# EAGLE board tester (EAGLE 9.6.2), part 1 of 2
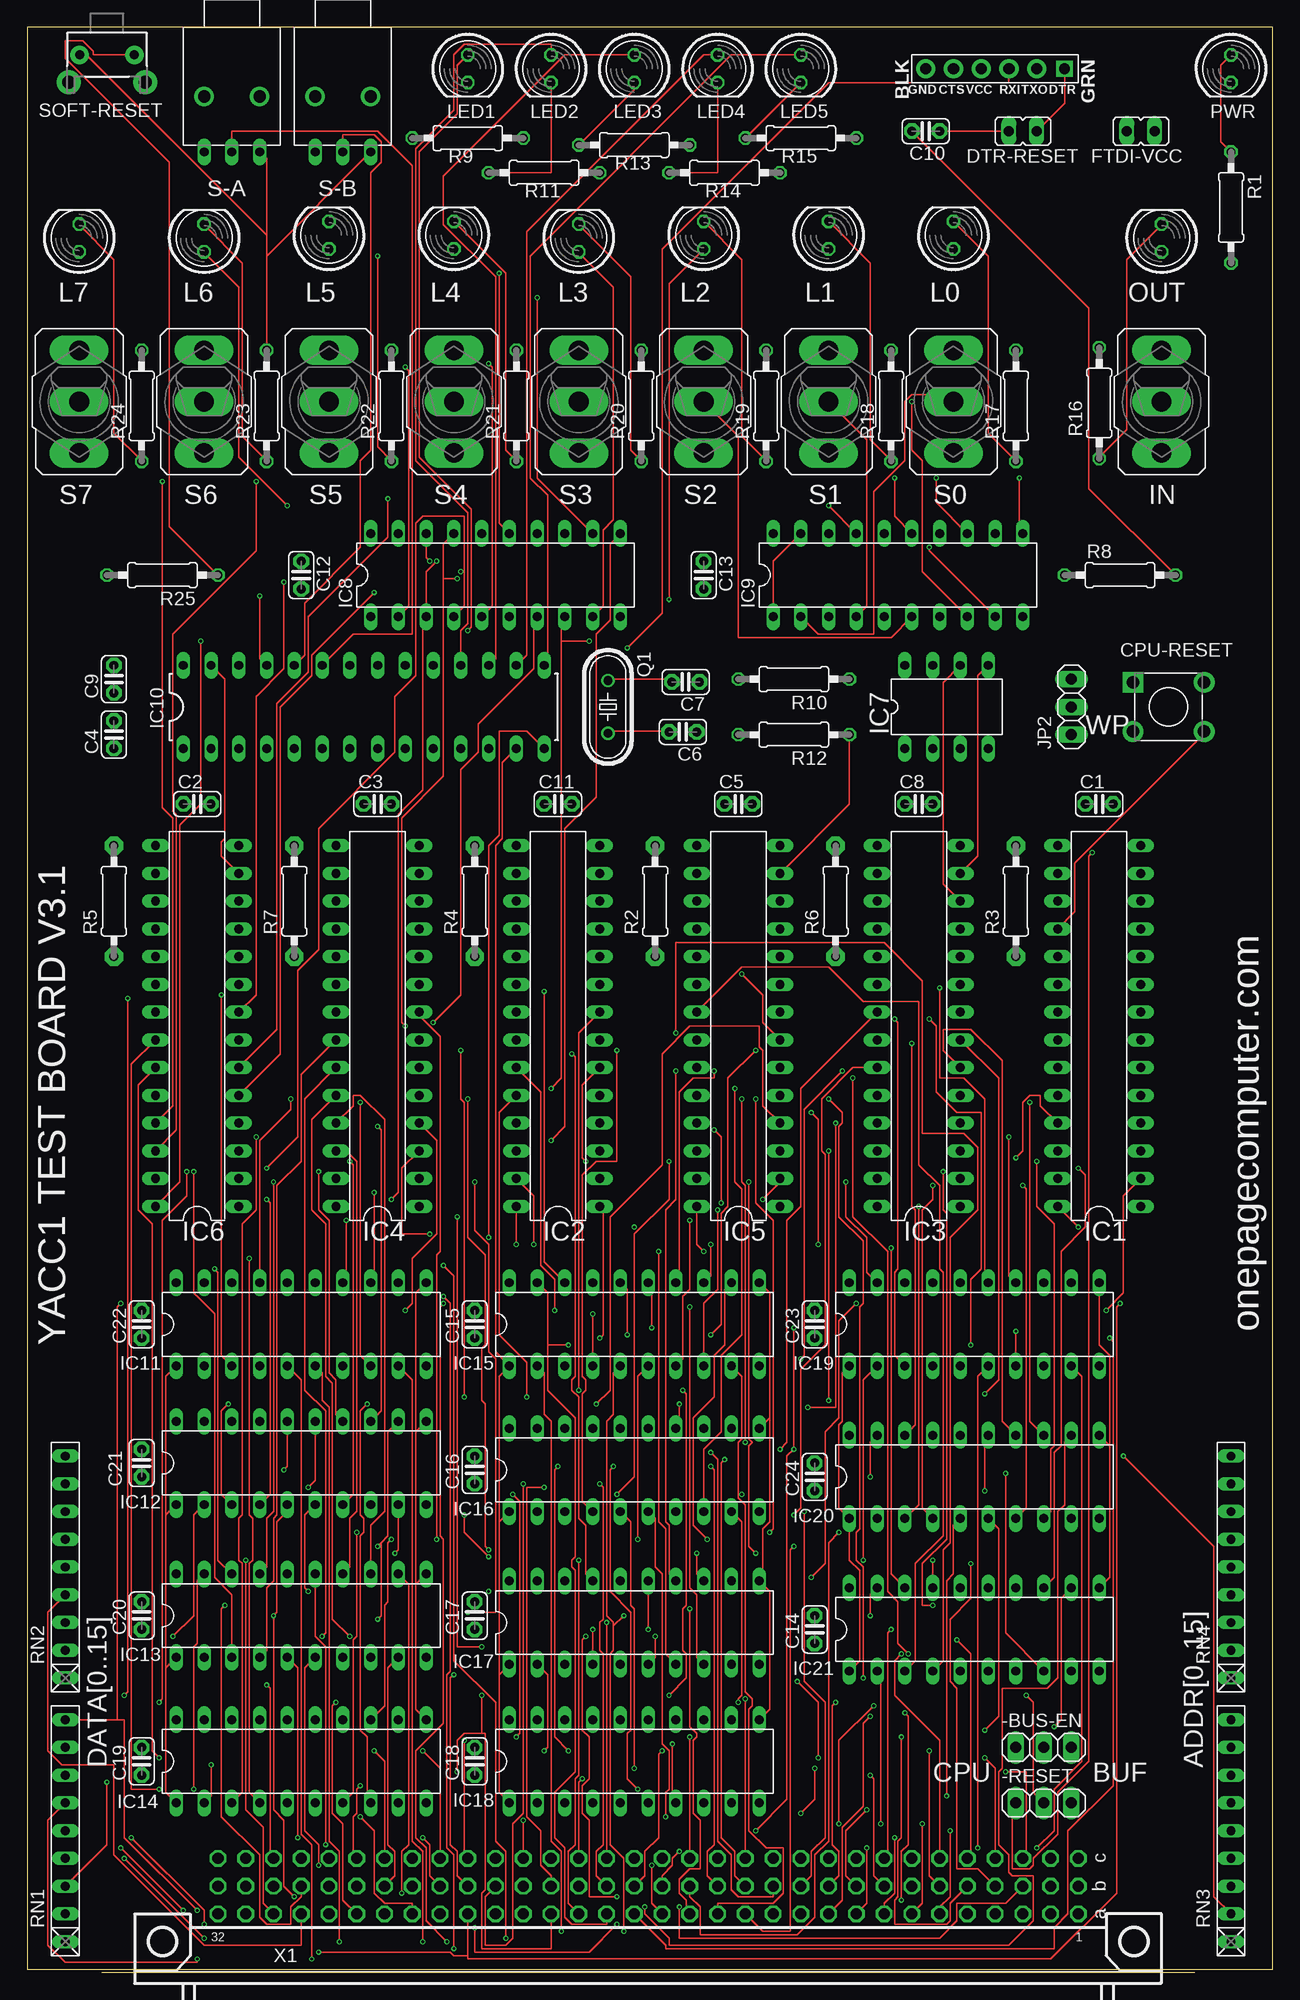
[diagram p0: board, top side]
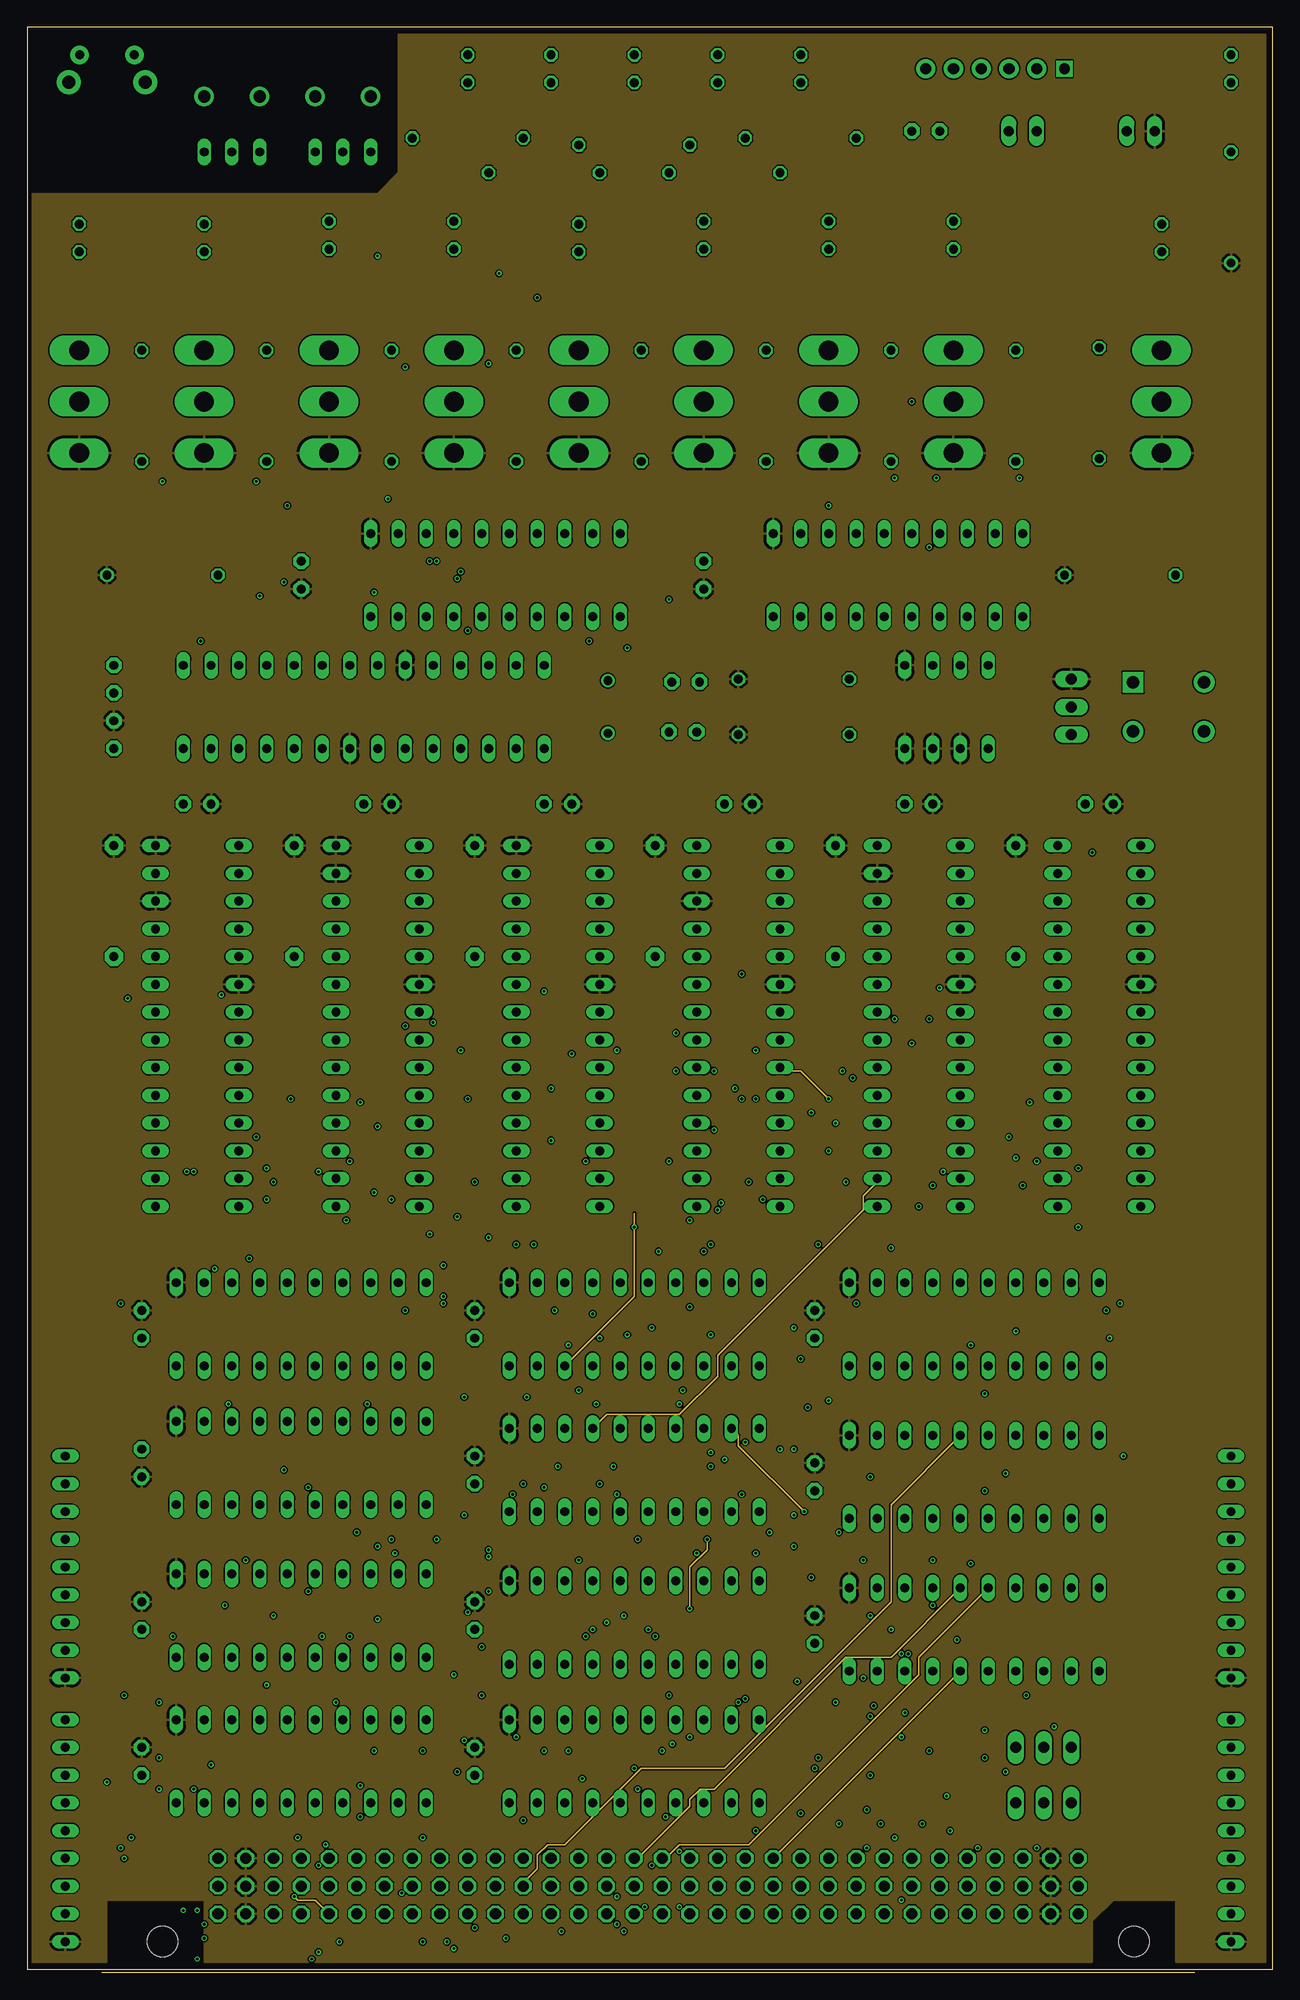
[diagram p1: board, inner layer Route2]
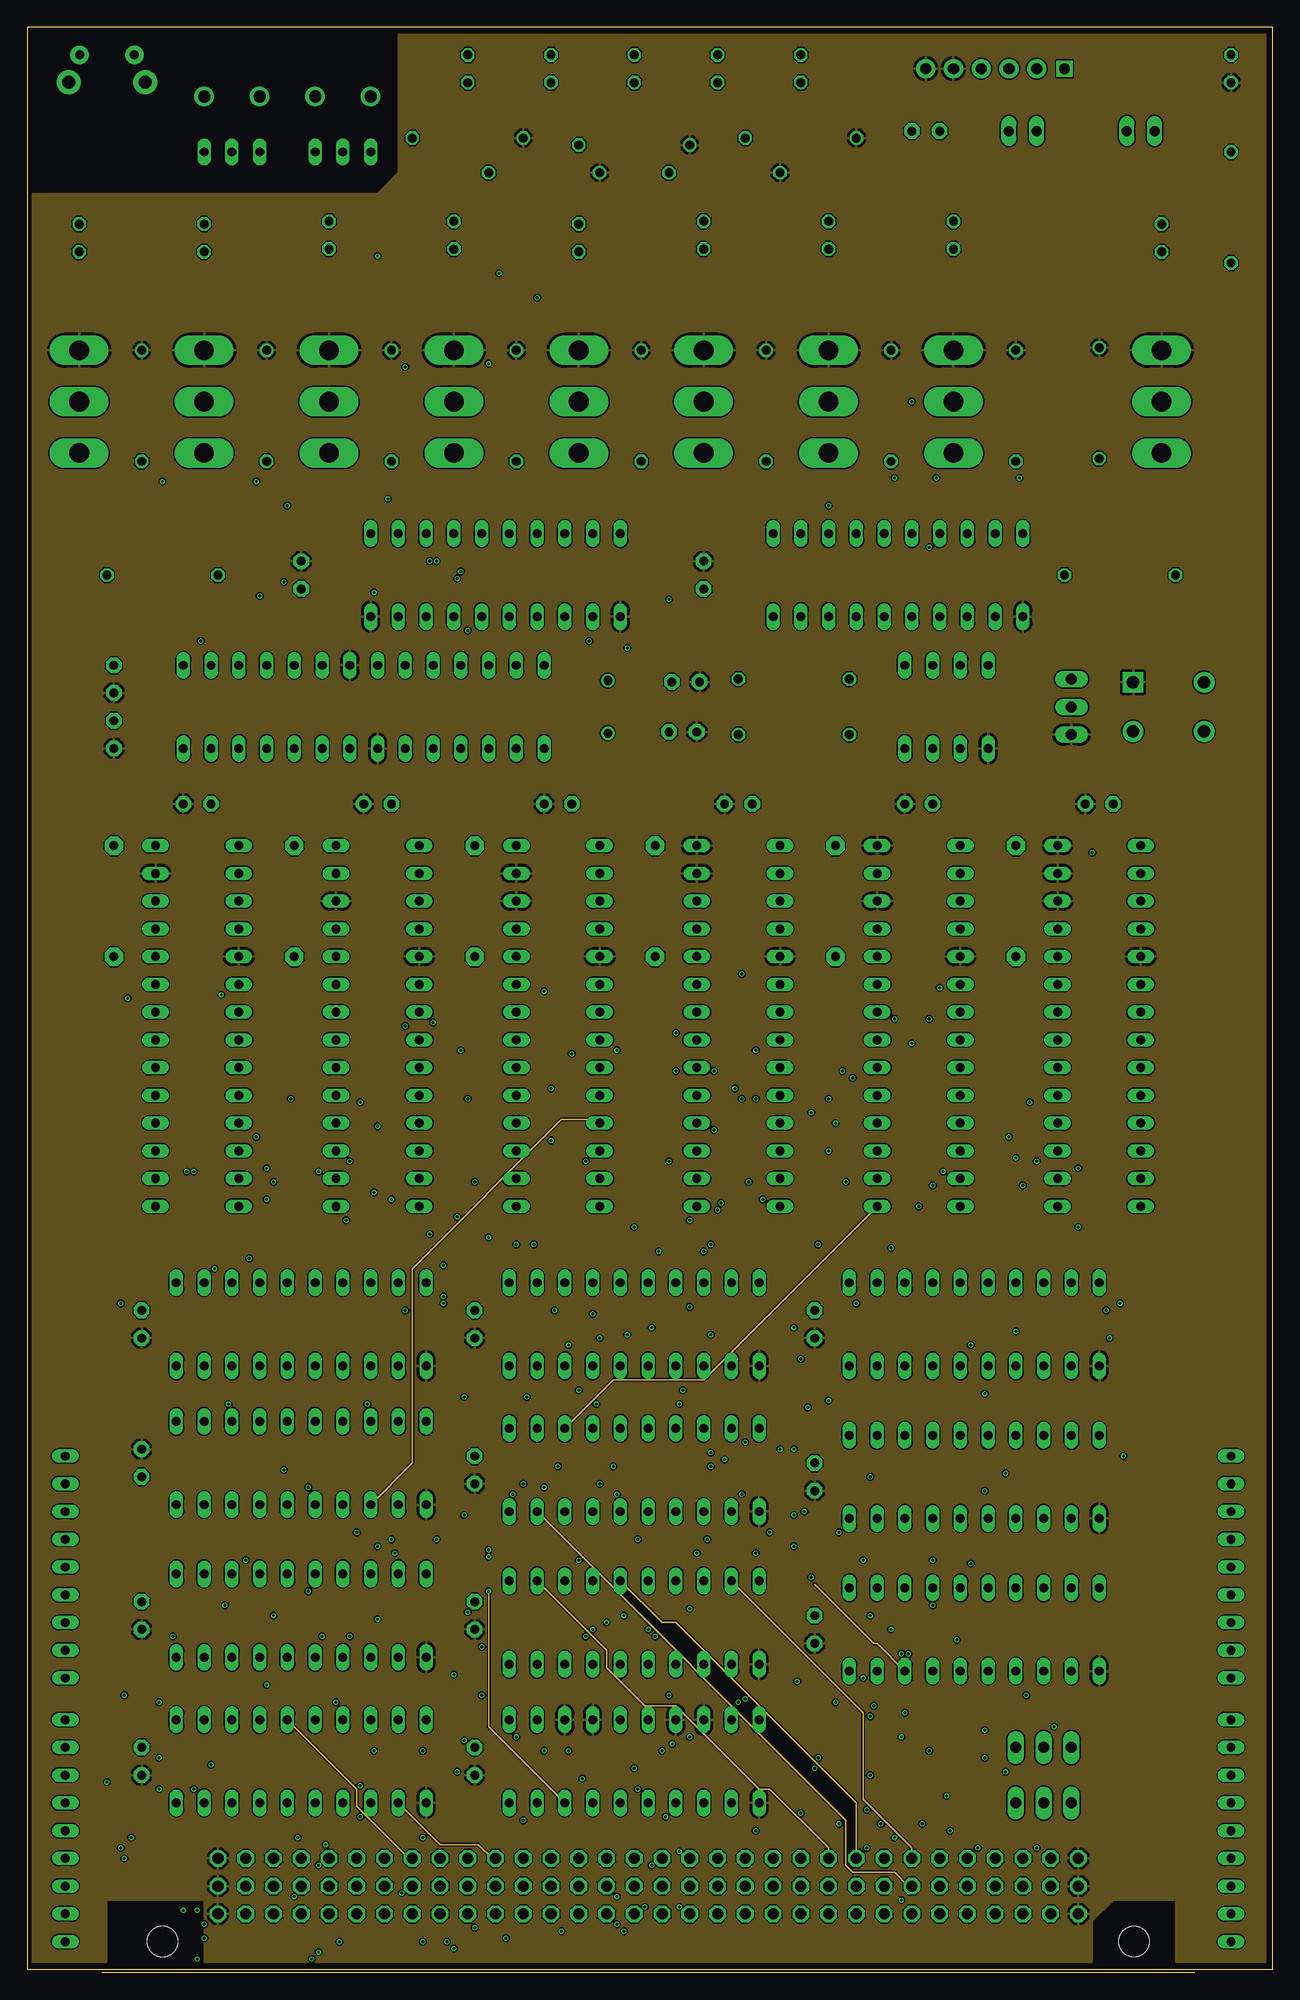
[diagram p2: board, inner layer Route15]
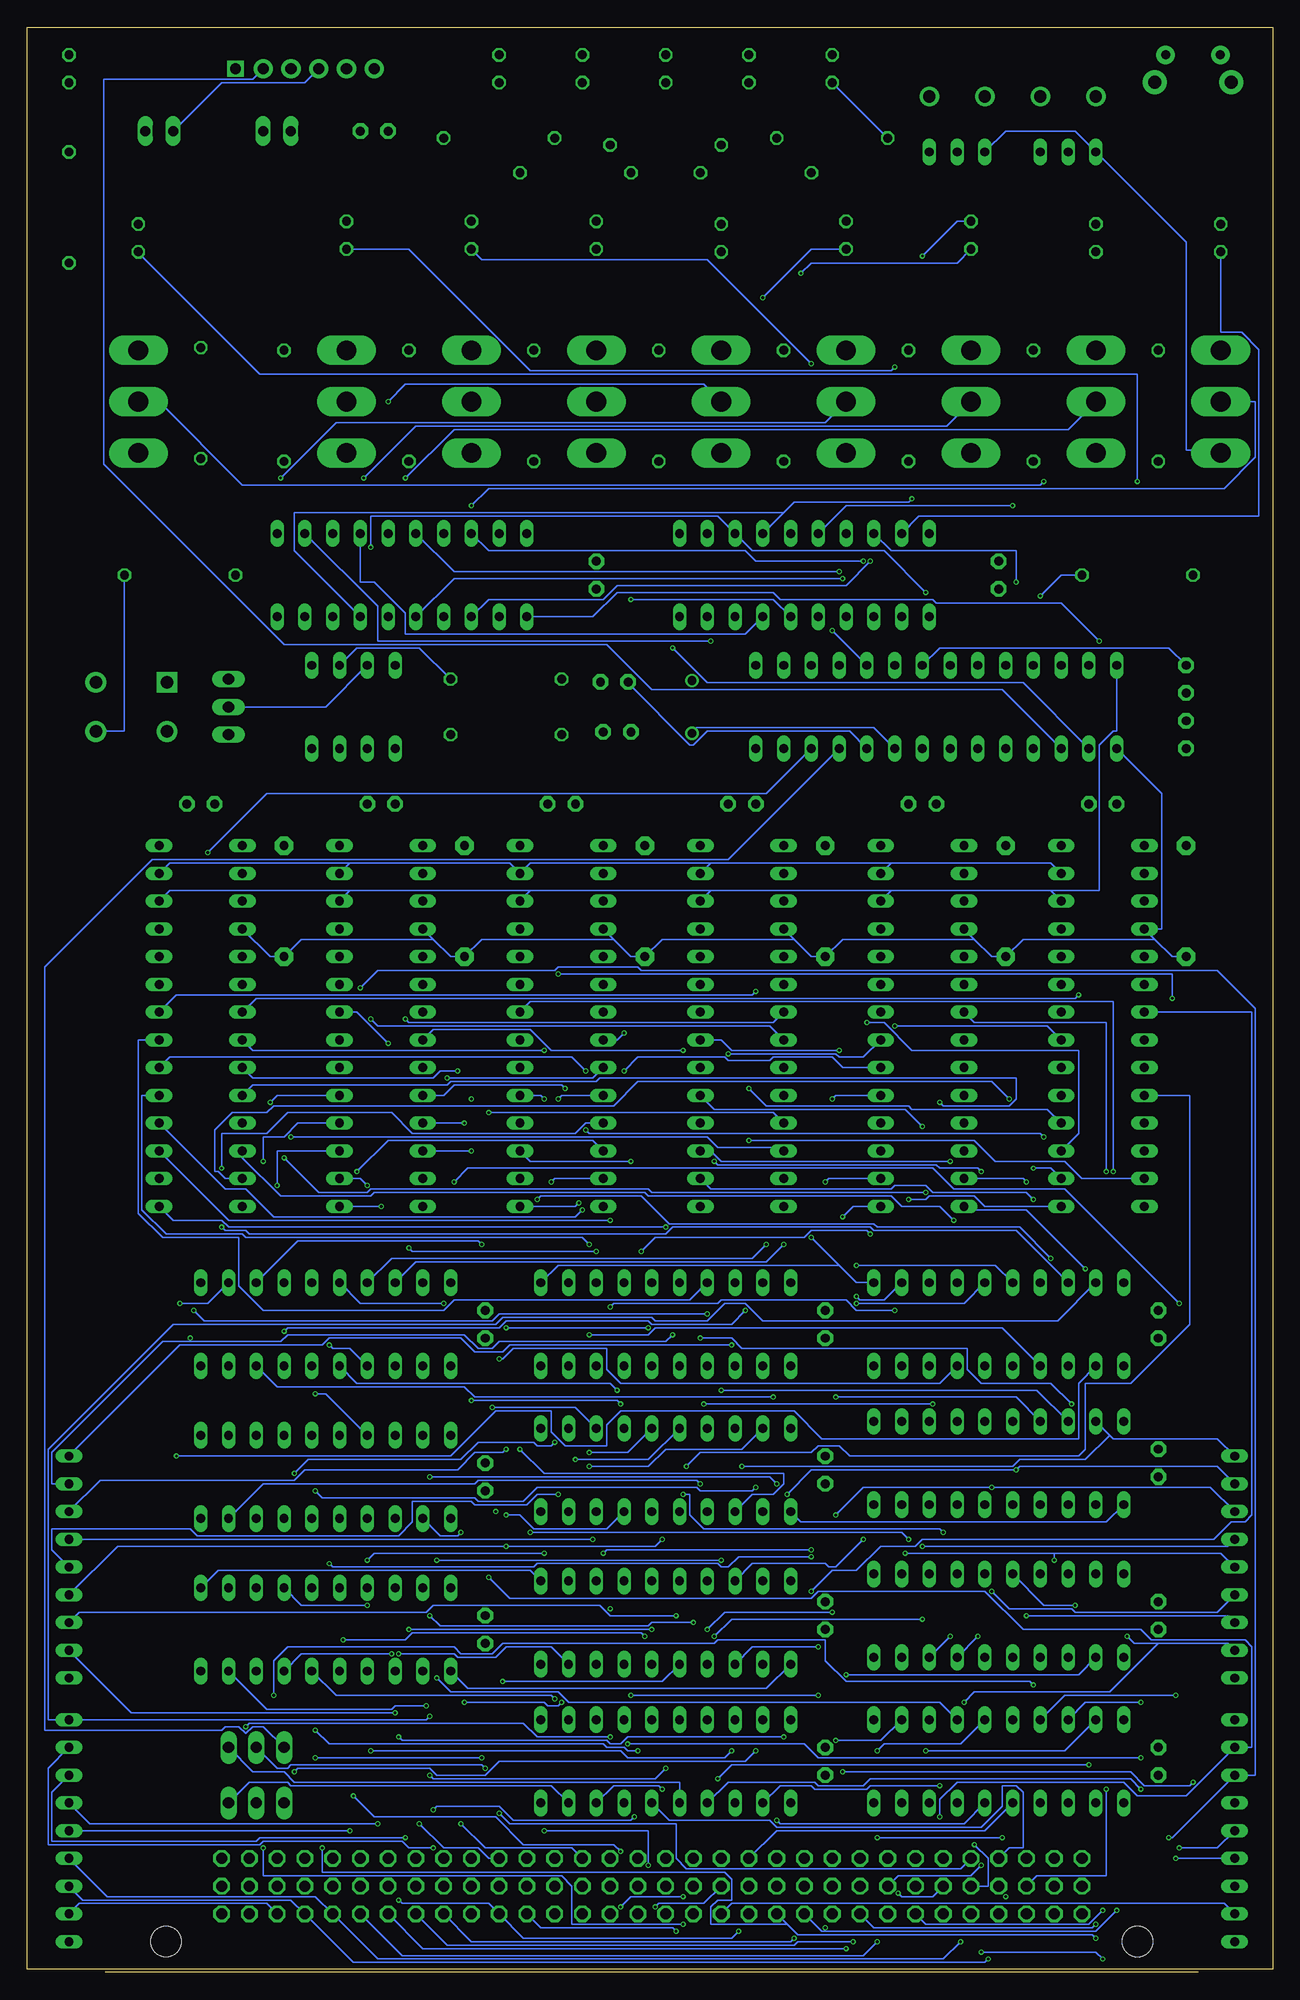
[diagram p3: board, bottom side, seen from below]

Size 113.97 x 177.78 mm. Coordinates in mm from the lower left corner, seen from the top.
Outline: 113.97,0 113.97,177.78 0,177.78 0,0 113.97,0
Copper layers (1*2*15*16): Top 0.035559375mm / dielectric 0.17018125mm / Route2 0.01778125mm / dielectric 47mil / Route15 0.01778125mm / dielectric 0.17018125mm / Bottom 0.035559375mm
Design rules "oshpark-4layer": minimum track width 5mil, minimum drill 10mil, track to track 5mil, track to pad 5mil, pad to pad 5mil, via to via 5mil, smd to smd 5mil, copper to edge 15mil, drill to drill 6mil, minimum pad ring 4mil, minimum via ring 4mil, stop-mask expansion 2.5mil, vias tented up to drill 0mil, thermal gap 10mil

## Footprints (pad centres in the part's own frame; a part is rotated, then mirrored left to right if it is on the bottom)
1X03 = drill 1.016 long: 1 -2.54,0; 2 0,0; 3 2.54,0
C025-024X044 = drill 0.813 pad 1.422 octagon: 1 -1.27,0; 2 1.27,0
SW4-6.2X6.2X5.0MM = drill 1.143 pad 1.905 square: 1 -3.25,2.25 | drill 1.143 pad 1.905: 2 -3.25,-2.25; 3 3.25,-2.25; 4 3.25,2.25
JP1 = drill 0.914 long: 1 0,-1.27; 2 0,1.27
DIL28-3 = drill 0.813 long: 1 -16.51,-3.81; 2 -13.97,-3.81; 3 -11.43,-3.81; 4 -8.89,-3.81; 5 -6.35,-3.81; 6 -3.81,-3.81; 7 -1.27,-3.81; 8 1.27,-3.81; 9 3.81,-3.81; 10 6.35,-3.81; 11 8.89,-3.81; 12 11.43,-3.81; 13 13.97,-3.81; 14 16.51,-3.81; 15 16.51,3.81; 16 13.97,3.81; 17 11.43,3.81; 18 8.89,3.81; 19 6.35,3.81; 20 3.81,3.81; 21 1.27,3.81; 22 -1.27,3.81; 23 -3.81,3.81; 24 -6.35,3.81; 25 -8.89,3.81; 26 -11.43,3.81; 27 -13.97,3.81; 28 -16.51,3.81
DIL8 = drill 0.813 long: 1 -3.81,-3.81; 2 -1.27,-3.81; 3 1.27,-3.81; 4 3.81,-3.81; 5 3.81,3.81; 6 1.27,3.81; 7 -1.27,3.81; 8 -3.81,3.81
DIL20 = drill 0.813 long: 1 -11.43,-3.81; 2 -8.89,-3.81; 3 -6.35,-3.81; 4 -3.81,-3.81; 5 -1.27,-3.81; 6 1.27,-3.81; 7 3.81,-3.81; 8 6.35,-3.81; 9 8.89,-3.81; 10 11.43,-3.81; 11 11.43,3.81; 12 8.89,3.81; 13 6.35,3.81; 14 3.81,3.81; 15 1.27,3.81; 16 -1.27,3.81; 17 -3.81,3.81; 18 -6.35,3.81; 19 -8.89,3.81; 20 -11.43,3.81
M9040P = drill 1.803 long: 1 0,4.699; 2 0,0; 3 0,-4.699
FTDI_DEVICE_SIDE = drill 1 square: P$1 -6.35,0 | drill 1.016 pad 1.778: P$2 -3.81,0; P$3 -1.27,0; P$4 1.27,0; P$5 3.81,0; P$6 6.35,0
LED5MM = drill 0.813 octagon: A -1.27,0; K 1.27,0
HC49/S = drill 0.813: 1 -2.413,0; 2 2.413,0
0207/10 = drill 0.813 octagon: 1 -5.08,0; 2 5.08,0
0207/10' = drill 0.813 pad 1.676 octagon: 1 -5.08,0; 2 5.08,0
RN-9 = drill 0.813 long: 1 -10.16,0; 2 -7.62,0; 3 -5.08,0; 4 -2.54,0; 5 0,0; 6 2.54,0; 7 5.08,0; 8 7.62,0; 9 10.16,0
9070-1W = drill 0.813 long: 1 5.08,-2.54; 2 5.08,0; 3 5.08,2.54 | drill 1.118 pad 1.778: B 0,-2.54; B1 0,2.54
TACTILE-PTH-SIDEEZ = drill 0.8 pad 1.7: 1 -2.5,0; 2 2.5,0 | drill 1.2 pad 2.2: ANCHOR1 -3.5,2.5; ANCHOR2 3.5,2.5
FABC96R = drill 1.016 octagon: A1 -2.54,39.37; A2 -2.54,36.83; A3 -2.54,34.29; A4 -2.54,31.75; A5 -2.54,29.21; A6 -2.54,26.67; A7 -2.54,24.13; A8 -2.54,21.59; A9 -2.54,19.05; A10 -2.54,16.51; A11 -2.54,13.97; A12 -2.54,11.43; A13 -2.54,8.89; A14 -2.54,6.35; A15 -2.54,3.81; A16 -2.54,1.27; A17 -2.54,-1.27; A18 -2.54,-3.81; A19 -2.54,-6.35; A20 -2.54,-8.89; A21 -2.54,-11.43; A22 -2.54,-13.97; A23 -2.54,-16.51; A24 -2.54,-19.05; A25 -2.54,-21.59; A26 -2.54,-24.13; A27 -2.54,-26.67; A28 -2.54,-29.21; A29 -2.54,-31.75; A30 -2.54,-34.29; A31 -2.54,-36.83; A32 -2.54,-39.37; B1 -5.08,39.37; B2 -5.08,36.83; B3 -5.08,34.29; B4 -5.08,31.75; B5 -5.08,29.21; B6 -5.08,26.67; B7 -5.08,24.13; B8 -5.08,21.59; B9 -5.08,19.05; B10 -5.08,16.51; B11 -5.08,13.97; B12 -5.08,11.43; B13 -5.08,8.89; B14 -5.08,6.35; B15 -5.08,3.81; B16 -5.08,1.27; B17 -5.08,-1.27; B18 -5.08,-3.81; B19 -5.08,-6.35; B20 -5.08,-8.89; B21 -5.08,-11.43; B22 -5.08,-13.97; B23 -5.08,-16.51; B24 -5.08,-19.05; B25 -5.08,-21.59; B26 -5.08,-24.13; B27 -5.08,-26.67; B28 -5.08,-29.21; B29 -5.08,-31.75; B30 -5.08,-34.29; B31 -5.08,-36.83; B32 -5.08,-39.37; C1 -7.62,39.37; C2 -7.62,36.83; C3 -7.62,34.29; C4 -7.62,31.75; C5 -7.62,29.21; C6 -7.62,26.67; C7 -7.62,24.13; C8 -7.62,21.59; C9 -7.62,19.05; C10 -7.62,16.51; C11 -7.62,13.97; C12 -7.62,11.43; C13 -7.62,8.89; C14 -7.62,6.35; C15 -7.62,3.81; C16 -7.62,1.27; C17 -7.62,-1.27; C18 -7.62,-3.81; C19 -7.62,-6.35; C20 -7.62,-8.89; C21 -7.62,-11.43; C22 -7.62,-13.97; C23 -7.62,-16.51; C24 -7.62,-19.05; C25 -7.62,-21.59; C26 -7.62,-24.13; C27 -7.62,-26.67; C28 -7.62,-29.21; C29 -7.62,-31.75; C30 -7.62,-34.29; C31 -7.62,-36.83; C32 -7.62,-39.37 | hole 2.794: 0,-44.456; 0,44.456

## Placement (x,y rotation side)
-BUS-EN  [1X03]  93.02,20.32 0 top
-RESET  [1X03]  93.02,15.24 0 top
C1  0.1  [C025-024X044]  98.1,106.68 0 top
C2  0.1  [C025-024X044]  15.55,106.68 0 top
C3  0.1  [C025-024X044]  32.05,106.68 0 top
C4  0.1  [C025-024X044]  7.92,113.03 90 top
C5  0.1  [C025-024X044]  65.08,106.68 0 top
C6  20pf  [C025-024X044]  60,113.28 180 top
C7  20pf  [C025-024X044]  60.25,117.86 180 top
C8  0.1  [C025-024X044]  81.58,106.68 0 top
C9  0.1  [C025-024X044]  7.92,118.11 90 top
C10  0.1  [C025-024X044]  82.22,168.28 180 top
C11  0.1  [C025-024X044]  48.56,106.68 0 top
C12  0.1  [C025-024X044]  25.07,127.63 270 top
C13  0.1  [C025-024X044]  61.9,127.63 270 top
C14  0.1  [C025-024X044]  72.06,31.12 90 top
C15  0.1  [C025-024X044]  40.94,59.05 90 top
C16  0.1  [C025-024X044]  40.94,45.72 90 top
C17  0.1  [C025-024X044]  40.94,32.38 90 top
C18  0.1  [C025-024X044]  40.94,19.05 90 top
C19  0.1  [C025-024X044]  10.46,19.05 90 top
C20  0.1  [C025-024X044]  10.46,32.38 90 top
C21  0.1  [C025-024X044]  10.46,46.36 270 top
C22  0.1  [C025-024X044]  10.46,59.05 90 top
C23  0.1  [C025-024X044]  72.06,59.05 90 top
C24  0.1  [C025-024X044]  72.06,45.09 90 top
CPU-RESET  TS-1109-7  [SW4-6.2X6.2X5.0MM]  104.45,115.57 0 top
DTR-RESET  [JP1]  91.11,168.28 90 top
FTDI-VCC  [JP1]  101.9,168.28 90 top
IC1  MCP23017SP  [DIL28-3]  98.1,86.36 90 top
IC2  MCP23017SP  [DIL28-3]  48.56,86.36 90 top
IC3  MCP23017SP  [DIL28-3]  81.58,86.36 90 top
IC4  MCP23017SP  [DIL28-3]  32.05,86.36 90 top
IC5  MCP23017SP  [DIL28-3]  65.08,86.36 90 top
IC6  MCP23017SP  [DIL28-3]  15.55,86.36 90 top
IC7  24AA01P  [DIL8]  84.12,115.57 0 top
IC8  74LS374N  [DIL20]  42.85,127.63 0 top
IC9  74LS244N  [DIL20]  79.68,127.63 0 top
IC10  ATMEGA328P_PDIP  [DIL28-3]  30.78,115.57 0 top
IC11  74LS373N  [DIL20]  25.07,59.05 0 top
IC12  74LS373N  [DIL20]  25.07,46.36 0 top
IC13  74LS373N  [DIL20]  25.07,32.38 0 top
IC14  74LS373N  [DIL20]  25.07,19.05 0 top
IC15  74LS373N  [DIL20]  55.55,59.05 0 top
IC16  74LS373N  [DIL20]  55.55,45.72 0 top
IC17  74LS373N  [DIL20]  55.55,31.75 0 top
IC18  74LS373N  [DIL20]  55.55,19.05 0 top
IC19  74LS373N  [DIL20]  86.67,59.05 0 top
IC20  74LS373N  [DIL20]  86.67,45.09 0 top
IC21  74LS373N  [DIL20]  86.67,31.12 0 top
IN  [M9040P]  103.81,143.51 180 top
JP1  FTDI_DEVICE  [FTDI_DEVICE_SIDE]  88.57,173.99 180 top
JP2  [1X03]  95.55,115.57 90 top
L0  [LED5MM]  84.76,158.75 90 top
L1  [LED5MM]  73.33,158.75 90 top
L2  [LED5MM]  61.9,158.75 90 top
L3  [LED5MM]  50.47,158.5 90 top
L4  [LED5MM]  39.04,158.75 90 top
L5  [LED5MM]  27.61,158.75 90 top
L6  [LED5MM]  16.18,158.5 90 top
L7  [LED5MM]  4.75,158.5 90 top
LED1  [LED5MM]  40.31,173.99 270 top
LED2  [LED5MM]  47.93,173.99 270 top
LED3  [LED5MM]  55.55,173.99 270 top
LED4  [LED5MM]  63.17,173.99 270 top
LED5  [LED5MM]  70.79,173.99 270 top
OUT  [LED5MM]  103.81,158.5 90 top
PWR  [LED5MM]  110.16,173.99 270 top
Q1  16Mhz  [HC49/S]  53.14,115.57 270 top
R1  330  [0207/10]  110.16,161.29 270 top
R2  10k  [0207/10']  57.45,97.79 90 top
R3  10k  [0207/10']  90.47,97.79 90 top
R4  10k  [0207/10']  40.94,97.79 90 top
R5  10k  [0207/10']  7.92,97.79 90 top
R6  10k  [0207/10']  73.97,97.79 90 top
R7  10k  [0207/10']  24.44,97.79 90 top
R8  10k  [0207/10]  100,127.63 0 top
R9  330  [0207/10]  40.31,167.64 0 top
R10  2.2k  [0207/10]  70.16,118.11 180 top
R11  330  [0207/10]  47.3,164.47 0 top
R12  2.2k  [0207/10]  70.16,113.03 180 top
R13  330  [0207/10]  55.55,167 0 top
R14  330  [0207/10]  63.8,164.47 0 top
R15  330  [0207/10]  70.79,167.64 0 top
R16  330  [0207/10]  98.1,143.38 90 top
R17  330  [0207/10]  90.47,143.13 90 top
R18  330  [0207/10]  79.05,143.13 90 top
R19  330  [0207/10]  67.61,143.13 90 top
R20  330  [0207/10]  56.19,143.13 90 top
R21  330  [0207/10]  44.75,143.13 90 top
R22  330  [0207/10]  33.33,143.13 90 top
R23  330  [0207/10]  21.89,143.13 90 top
R24  330  [0207/10]  10.46,143.13 90 top
R25  10k  [0207/10]  12.37,127.63 180 top
RN1  [RN-9]  3.48,12.7 90 top
RN2  [RN-9]  3.48,36.83 90 top
RN3  [RN-9]  110.16,12.7 90 top
RN4  [RN-9]  110.16,36.83 90 top
S0  [M9040P]  84.76,143.51 180 top
S1  [M9040P]  73.33,143.51 180 top
S2  [M9040P]  61.9,143.51 180 top
S3  [M9040P]  50.47,143.51 180 top
S4  [M9040P]  39.04,143.51 180 top
S5  [M9040P]  27.61,143.51 180 top
S6  [M9040P]  16.18,143.51 180 top
S7  [M9040P]  4.75,143.51 180 top
S-A  [9070-1W]  18.72,171.45 270 top
S-B  [9070-1W]  28.88,171.45 270 top
SOFT-RESET  SWITCH-MOMENTARY-2SIDE_EZ  [TACTILE-PTH-SIDEEZ]  7.29,175.26 180 top
X1  FABC96R  [FABC96R]  56.82,2.54 270 top

## Library data of the parts
-BUS-EN -RESET JP2 = pinhead
C1-C24 R2-R7 = adafruit
CPU-RESET = Seeed-OPL-Switch; MPN: TS-1109-7
DTR-RESET FTDI-VCC = jumper
IC1-IC6 = microchip; MF: MICROCHIP; MPN: MCP23017-E/SP; OC_FARNELL: 1332088; OC_NEWARK: 31K2959
IC7 = microchip; MPN: 24AA01-I/P; OC_FARNELL: 1331266; OC_NEWARK: 35M0692
IC8 IC9 IC11-IC21 = 74xx-us
IC10 = SparkFun-DigitalIC
IN S0 S1-S7 S-A S-B = switch
JP1 = SparkFun-Connectors
L0 L1-L7 LED1-LED5 OUT PWR = led
Q1 = crystal; OC_FARNELL: 1667008; OC_NEWARK: unknown
R1 = eagle-ltspice; SPICEMODEL: NONE; SPICEPREFIX: R
R8-R25 = resistor
RN1-RN4 = resistor-net; OC_FARNELL: unknown; OC_NEWARK: unknown
SOFT-RESET = SparkFun-Electromechanical
X1 = con-vg

## Nets
-BUF-EN: IC10.13 IC11.1 IC12.1 IC13.1 IC14.1 IC15.1 IC16.1 IC17.1 IC18.1 IC19.1 IC20.1 IC21.1
-RESET: C10.2 CPU-RESET.3 IC1.18 IC2.18 IC3.18 IC4.18 IC5.18 IC6.18 IC10.1 R2.1 R3.1 R4.1 R5.1 R6.1 R7.1 R8.2
-SOFT-BUS-EN: -BUS-EN.1 IC10.11
-SOFT-RESET: -RESET.1 IC10.12
A3: IC11.2 RN3.2 X1.A3
A4: IC11.5 RN3.3 X1.A4
A5: IC11.6 RN3.4 X1.A5
A6: IC11.9 RN3.5 X1.A6
A7: IC11.12 RN3.6 X1.A7
A8: IC11.15 RN3.7 X1.A8
A9: IC11.16 RN3.8 X1.A9
A10: IC11.19 RN3.9 X1.A10
A11: IC15.2 RN4.2 X1.A11
A12: IC15.5 RN4.3 X1.A12
A13: IC15.6 RN4.4 X1.A13
A14: IC15.9 RN4.5 X1.A14
A15: IC15.12 RN4.6 X1.A15
A16: IC15.15 RN4.7 X1.A16
A17: IC15.16 RN4.8 X1.A17
A18: IC15.19 RN4.9 X1.A18
A19: IC19.2 RN1.2 X1.A19
A20: IC19.5 RN1.3 X1.A20
A21: IC19.6 RN1.4 X1.A21
A22: IC19.9 RN1.5 X1.A22
A23: IC19.12 RN1.6 X1.A23
A24: IC19.15 RN1.7 X1.A24
A25: IC19.16 RN1.8 X1.A25
A26: IC19.19 RN1.9 X1.A26
A27: IC12.2 RN2.2 X1.A27
A28: IC12.5 RN2.3 X1.A28
A29: IC12.6 RN2.4 X1.A29
A30: IC12.9 RN2.5 X1.A30
ARD-RXIN: IC10.2 JP1.P$3
ARD-TXOUT: IC10.3 JP1.P$2
B3: IC12.12 RN2.6 X1.B3
B4: IC12.15 RN2.7 X1.B4
B5: IC12.16 RN2.8 X1.B5
B6: IC12.19 RN2.9 X1.B6
B7: IC16.2 X1.B7
B8: IC16.5 X1.B8
B9: IC16.6 X1.B9
B10: IC16.9 X1.B10
B11: IC16.12 X1.B11
B12: IC16.15 X1.B12
B13: IC16.16 X1.B13
B14: IC16.19 X1.B14
B15: IC20.2 X1.B15
B16: IC20.5 X1.B16
B17: IC20.6 X1.B17
B18: IC20.9 X1.B18
B19: IC20.12 X1.B19
B20: IC20.15 X1.B20
B21: IC20.16 X1.B21
B22: IC20.19 X1.B22
B23: IC13.2 X1.B23
B24: IC13.5 X1.B24
B25: IC13.6 X1.B25
B26: IC13.9 X1.B26
B27: IC13.12 X1.B27
B28: IC13.15 X1.B28
B29: IC13.16 X1.B29
B30: IC13.19 X1.B30
BIT0: IC6.1 IC8.3 IC9.18
BIT1: IC6.2 IC8.4 IC9.16
BIT2: IC6.3 IC8.7 IC9.14
BIT3: IC6.4 IC8.8 IC9.12
BIT4: IC6.5 IC8.13 IC9.9
BIT5: IC6.6 IC8.14 IC9.7
BIT6: IC6.7 IC8.17 IC9.5
BIT7: IC6.8 IC8.18 IC9.3
BUF-A3: IC1.21 IC11.3
BUF-A4: IC1.22 IC11.4
BUF-A5: IC1.23 IC11.7
BUF-A6: IC1.24 IC11.8
BUF-A7: IC1.25 IC11.13
BUF-A8: IC1.26 IC11.14
BUF-A9: IC1.27 IC11.17
BUF-A10: IC1.28 IC11.18
BUF-A11: IC1.1 IC15.3
BUF-A12: IC1.2 IC15.4
BUF-A13: IC1.3 IC15.7
BUF-A14: IC1.4 IC15.8
BUF-A15: IC1.5 IC15.13
BUF-A16: IC1.6 IC15.14
BUF-A17: IC1.7 IC15.17
BUF-A18: IC1.8 IC15.18
BUF-A19: IC2.21 IC19.3
BUF-A20: IC2.22 IC19.4
BUF-A21: IC2.23 IC19.7
BUF-A22: IC2.24 IC19.8
BUF-A23: IC2.25 IC19.13
BUF-A24: IC2.26 IC19.14
BUF-A25: IC2.27 IC19.17
BUF-A26: IC2.28 IC19.18
BUF-A27: IC2.1 IC12.3
BUF-A28: IC2.2 IC12.4
BUF-A29: IC2.3 IC12.7
BUF-A30: IC2.4 IC12.8
BUF-B3: IC2.5 IC12.13
BUF-B4: IC2.6 IC12.14
BUF-B5: IC2.7 IC12.17
BUF-B6: IC2.8 IC12.18
BUF-B7: IC3.21 IC16.3
BUF-B8: IC3.22 IC16.4
BUF-B9: IC3.23 IC16.7
BUF-B10: IC3.24 IC16.8
BUF-B11: IC3.25 IC16.13
BUF-B12: IC3.26 IC16.14
BUF-B13: IC3.27 IC16.17
BUF-B14: IC3.28 IC16.18
BUF-B15: IC3.1 IC20.3
BUF-B16: IC3.2 IC20.4
BUF-B17: IC3.3 IC20.7
BUF-B18: IC3.4 IC20.8
BUF-B19: IC3.5 IC20.13
BUF-B20: IC3.6 IC20.14
BUF-B21: IC3.7 IC20.17
BUF-B22: IC3.8 IC20.18
BUF-B23: IC4.21 IC13.3
BUF-B24: IC4.22 IC13.4
BUF-B25: IC4.23 IC13.7
BUF-B26: IC4.24 IC13.8
BUF-B27: IC4.25 IC13.13
BUF-B28: IC4.26 IC13.14
BUF-B29: IC4.27 IC13.17
BUF-B30: IC4.28 IC13.18
BUF-C3: IC4.1 IC17.3
BUF-C4: IC4.2 IC17.4
BUF-C5: IC4.3 IC17.7
BUF-C6: IC4.4 IC17.8
BUF-C7: IC4.5 IC17.13
BUF-C8: IC4.6 IC17.14
BUF-C9: IC4.7 IC17.17
BUF-C10: IC4.8 IC17.18
BUF-C11: IC5.21 IC21.3
BUF-C12: IC5.22 IC21.4
BUF-C13: IC5.23 IC21.7
BUF-C14: IC5.24 IC21.8
BUF-C15: IC5.25 IC21.13
BUF-C16: IC5.26 IC21.14
BUF-C17: IC5.27 IC21.17
BUF-C18: IC5.28 IC21.18
BUF-C19: IC5.1 IC14.3
BUF-C20: IC5.2 IC14.4
BUF-C21: IC5.3 IC14.7
BUF-C22: IC5.4 IC14.8
BUF-C23: IC5.5 IC14.13
BUF-C24: IC5.6 IC14.14
BUF-C25: IC5.7 IC14.17
BUF-C26: IC5.8 IC14.18
BUF-C27: IC6.21 IC18.3
BUF-C28: IC6.22 IC18.4
BUF-C29: IC6.23 IC18.7
BUF-C30: IC6.24 IC18.8
BUF-CLK: IC10.14 IC11.11 IC12.11 IC13.11 IC14.11 IC15.11 IC16.11 IC17.11 IC18.11 IC19.11 IC20.11 IC21.11
C3: IC17.2 X1.C3
C4: IC17.5 X1.C4
C5: IC17.6 X1.C5
C6: IC17.9 X1.C6
C7: IC17.12 X1.C7
C8: IC17.15 X1.C8
C9: IC17.16 X1.C9
C10: IC17.19 X1.C10
C11: IC21.2 X1.C11
C12: IC21.5 X1.C12
C13: IC21.6 X1.C13
C14: IC21.9 X1.C14
C15: IC21.12 X1.C15
C16: IC21.15 X1.C16
C17: IC21.16 X1.C17
C18: IC21.19 X1.C18
C19: IC14.2 X1.C19
C20: IC14.5 X1.C20
C21: IC14.6 X1.C21
C22: IC14.9 X1.C22
C23: IC14.12 X1.C23
C24: IC14.15 X1.C24
C25: IC14.16 X1.C25
C26: IC14.19 X1.C26
C27: IC18.2 X1.C27
C28: -BUS-EN.2 X1.C28
C29: IC18.6 X1.C29
C30: -RESET.2 X1.C30
GND: C1.1 C2.1 C3.1 C4.1 C5.1 C6.1 C7.1 C8.1 C9.1 C11.1 C12.1 C13.1 C14.1 C15.1 C16.1 C17.1 C18.1 C19.1 C20.1 C21.1 C22.1 C23.1 C24.1 CPU-RESET.1 IC1.10 IC1.15 IC1.16 IC1.17 IC2.10 IC2.16 IC2.17 IC3.10 IC3.15 IC3.17 IC4.10 IC4.17 IC5.10 IC5.15 IC5.16 IC6.10 IC6.16 IC7.4 IC8.1 IC8.10 IC9.10 IC10.8 IC10.22 IC11.10 IC12.10 IC13.10 IC14.10 IC15.10 IC16.10 IC17.10 IC18.10 IC18.13 IC18.14 IC18.17 IC18.18 IC19.10 IC20.10 IC21.10 IN.3 JP1.P$5 JP1.P$6 JP2.1 PWR.K R9.2 R11.2 R13.2 R14.2 R15.2 R16.2 R17.2 R18.2 R19.2 R20.2 R21.2 R22.2 R23.2 R24.2 S0.3 S1.3 S2.3 S3.3 S4.3 S5.3 S6.3 S7.3 S-A.3 S-B.3 SOFT-RESET.2 X1.A1 X1.A32 X1.B1 X1.B32 X1.C1 X1.C32
IN-SWITCH: IC6.26 IN.2
LEDS-LD: IC6.27 IC8.11
N$1: IC10.19 LED1.A
N$2: IC7.7 JP2.2
N$3: C6.2 IC10.9 Q1.2
N$4: C7.2 IC10.10 Q1.1
N$5: PWR.A R1.1
N$6: IC10.18 LED2.A
N$7: IC10.17 LED3.A
N$8: IC10.16 LED4.A
N$9: C10.1 DTR-RESET.2
N$10: IC10.15 LED5.A
N$11: LED2.K R11.1
N$12: LED1.K R9.1
N$13: LED3.K R13.1
N$14: C9.2 IC10.21
N$15: LED4.K R14.1
N$16: LED5.K R15.1
N$17: L7.K R24.1
N$18: IC10.23 S-A.2
N$19: IC10.24 S-B.2
N$20: L6.K R23.1
N$21: L5.K R22.1
N$22: L4.K R21.1
N$23: L3.K R20.1
N$24: L2.K R19.1
N$25: L1.K R18.1
N$26: L0.K R17.1
N$27: OUT.K R16.1
N$28: DTR-RESET.1 JP1.P$1
N$29: FTDI-VCC.2 JP1.P$4
N$30: -BUS-EN.3 IC18.5
N$31: IC8.5 L1.A
N$32: IC8.9 L3.A
N$33: IC8.12 L4.A
N$34: IC8.15 L5.A
N$35: IC8.6 L2.A
N$36: IC8.16 L6.A
N$37: IC8.19 L7.A
N$38: IC8.2 L0.A
N$39: IC10.25 R25.1 SOFT-RESET.1
N$40: IC9.2 S0.2
N$41: IC9.8 S3.2
N$42: IC9.6 S2.2
N$43: IC9.4 S1.2
N$44: IC9.11 S4.2
N$45: IC9.17 S7.2
N$46: IC9.13 S5.2
N$47: IC9.15 S6.2
N$48: -RESET.3 IC18.9
OUT-LED: IC6.25 OUT.A
SCL: IC1.12 IC2.12 IC3.12 IC4.12 IC5.12 IC6.12 IC7.6 IC10.28 R10.1
SDA: IC1.13 IC2.13 IC3.13 IC4.13 IC5.13 IC6.13 IC7.5 IC10.27 R12.1
SWITCHES-RD: IC6.28 IC9.1 IC9.19
VCC: C1.2 C2.2 C3.2 C4.2 C5.2 C8.2 C11.2 C12.2 C13.2 C14.2 C15.2 C16.2 C17.2 C18.2 C19.2 C20.2 C21.2 C22.2 C23.2 C24.2 FTDI-VCC.1 IC1.9 IC2.9 IC2.15 IC3.9 IC3.16 IC4.9 IC4.15 IC4.16 IC5.9 IC5.17 IC6.9 IC6.15 IC6.17 IC7.1 IC7.2 IC7.3 IC7.8 IC8.20 IC9.20 IC10.7 IC10.20 IC11.20 IC12.20 IC13.20 IC14.20 IC15.20 IC16.20 IC17.20 IC18.20 IC19.20 IC20.20 IC21.20 IN.1 JP2.3 R1.2 R2.2 R3.2 R4.2 R5.2 R6.2 R7.2 R8.1 R10.2 R12.2 R25.2 RN1.1 RN2.1 RN3.1 RN4.1 S0.1 S1.1 S2.1 S3.1 S4.1 S5.1 S6.1 S7.1 S-A.1 S-B.1 X1.A2 X1.A31 X1.B2 X1.B31 X1.C2 X1.C31